# Altium PCB EDR - Water Meter.PcbDoc (part 1 of 2)
Units mm, origin at the board's own origin, x right, y up, seen from the top; angles counter-clockwise.
Board outline 78 x 60 mm, 2 copper layers (Top Layer, Bottom Layer), stack 1.571 mm thick; 60 components, 41 nets, 194 pads, 54 vias.
Unrouted connection lines stored in the file: 1.
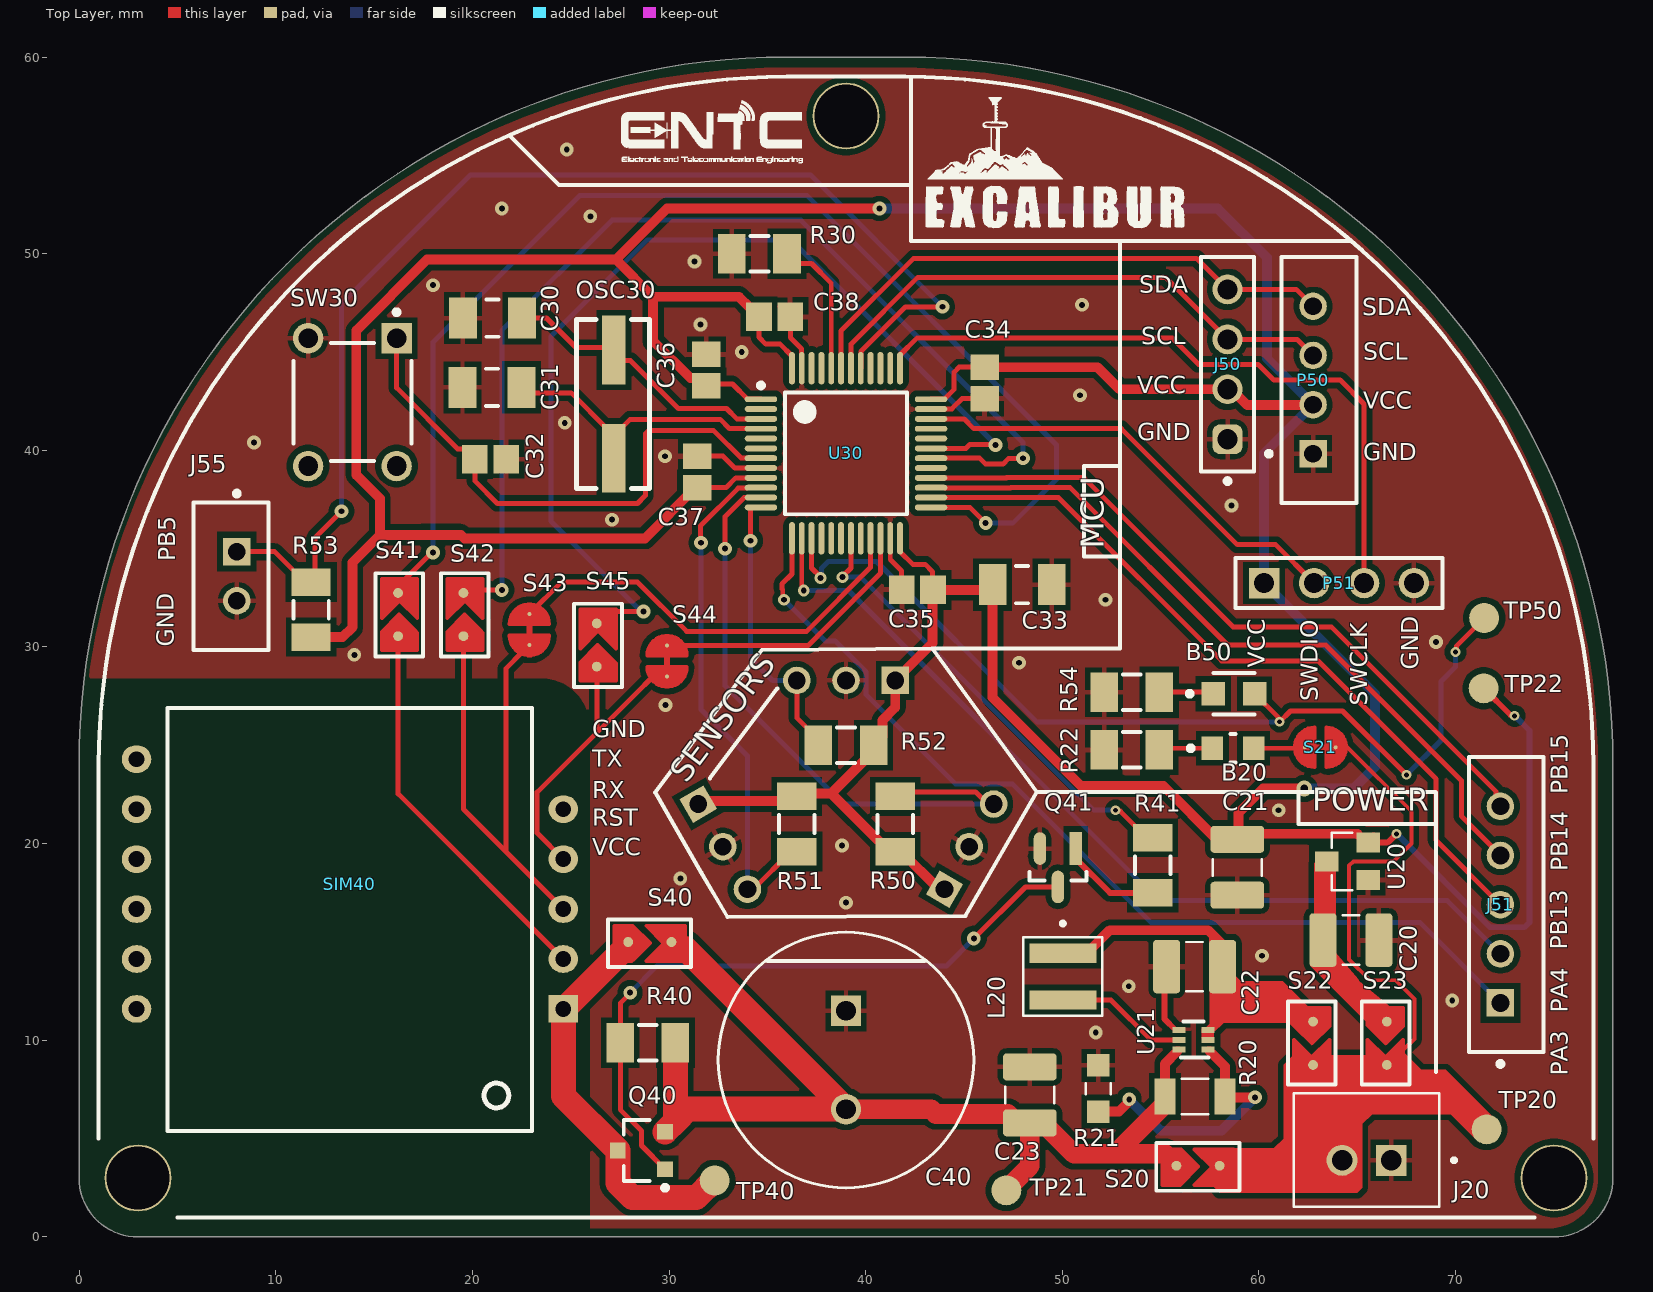
[diagram p0: Top Layer view]
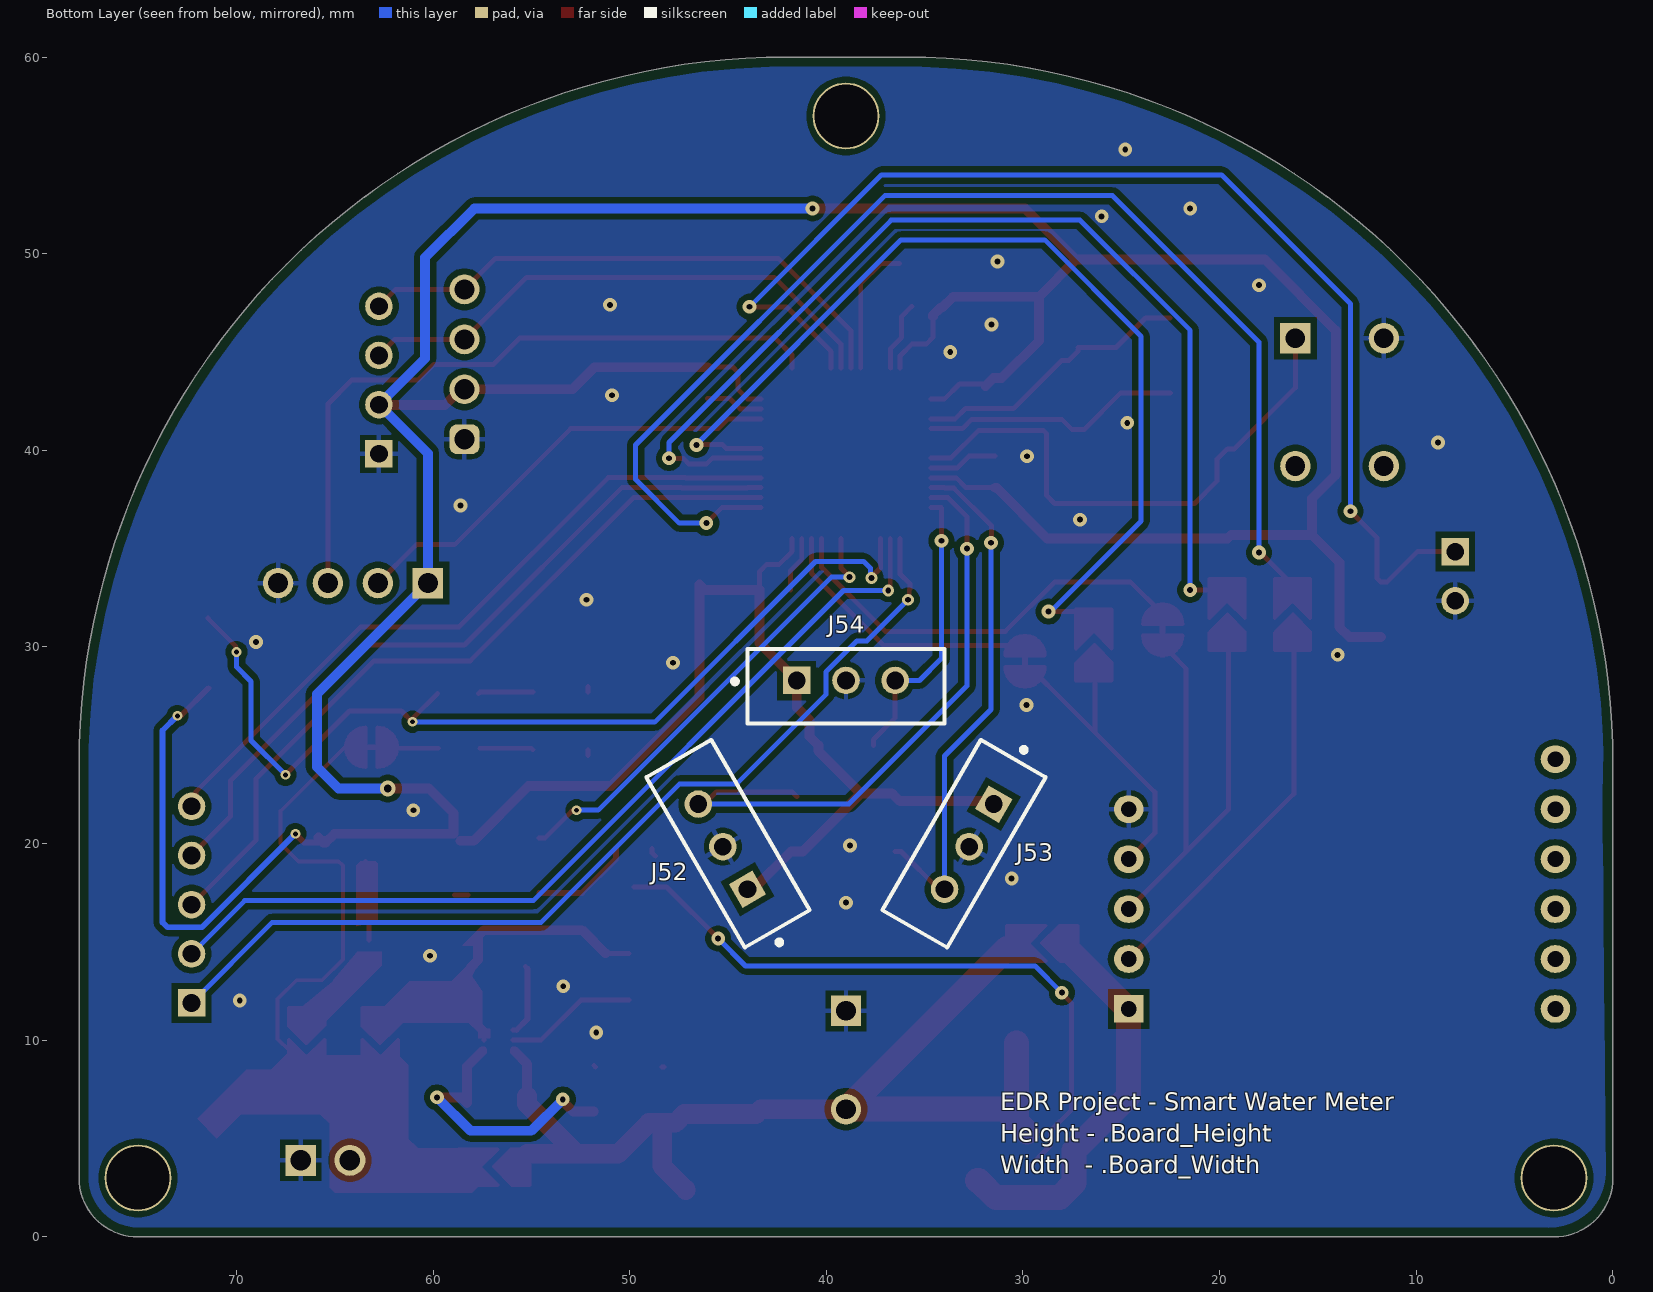
[diagram p1: Bottom Layer view, seen from below]
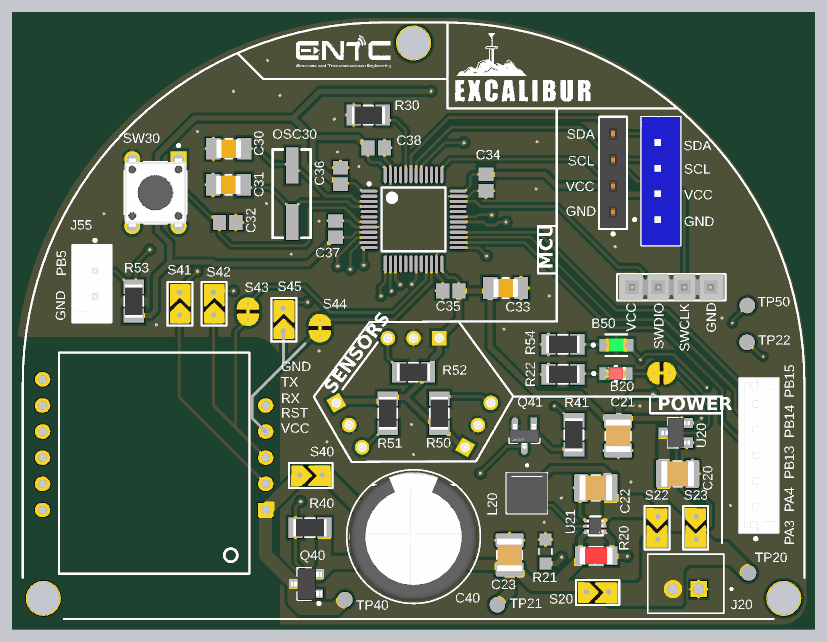
[diagram p2: 3D render of the assembled board from above, using the file's embedded part models]
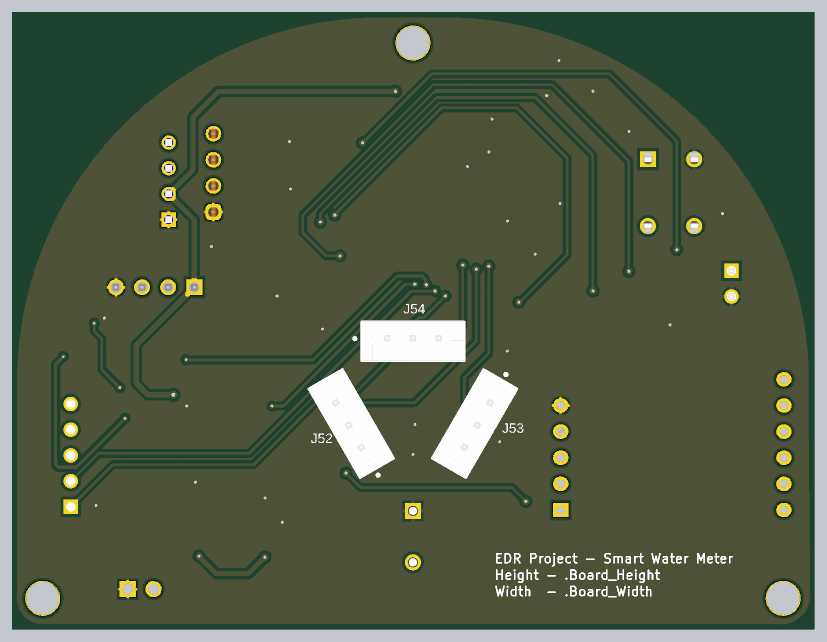
[diagram p3: 3D render of the assembled board from below, using the file's embedded part models]

## Layer stack, top to bottom
Top Solder: solder mask 0.0102, Solder Resist, Dk 3.5
Top Layer: signal copper 0.0356
Dielectric 1: dielectric 1.5, FR-4, Dk 4.6
Bottom Layer: signal copper 0.0356
Bottom Solder: solder mask 0.0102, Solder Resist, Dk 3.5

## Board outline
0,3 ccw(c3,3) 3,0 75,0 ccw(c75,3) 78,3 78,24 ccw(c42,24) 42,60 36,60 ccw(c36,24) 0,24

## Design rules (kind name [scope] priority, off if disabled: settings)
Clearance clearence_polygon [InPolygon] p1: gap=0.3 ignorepadtopadclearanceinfootprint=TRUE
Clearance [All] p2: gap=0.15 ignorepadtopadclearanceinfootprint=TRUE
HoleSize [All] p1: absolutevalues=TRUE maxlimit=5 minlimit=0.025 maxpercent=80.000 minpercent=20.000
MinimumSolderMaskSliver [All] p1: minsoldermaskwidth=0.08
PolygonConnect PolygonConnect_1 [All] p1: thpad.connectstyle=Relief thpad.reliefconductorwidth=0.254 thpad.reliefentries=4 thpad.polygonreliefangle="90 Angle" thpad.airgapwidth=0.254 smdpad.connectstyle=Relief smdpad.reliefconductorwidth=0.254 smdpad.reliefentries=4 smdpad.polygonreliefangle="90 Angle" smdpad.airgapwidth=0.254 via.connectstyle=Direct via.reliefconductorwidth=0.254 via.reliefentries=4 via.polygonreliefangle="90 Angle" via.airgapwidth=0.254
RoutingVias [All] p1: holewidth=0.25 width=0.5 viastyle="Through Hole" minholewidth=0.25 minwidth=0.5 maxholewidth=0.711 maxwidth=1.27
SilkToSilkClearance [All] p1: silktosilkclearance=0.15
SilkToSolderMaskClearance [IsPad] p1: minsilkscreentomaskgap=0.15 clearancetoexposedcopper=TRUE
SolderMaskExpansion [All] p1: expansion=0.102 istentingtop=FALSE
SupplyNets "Schematic Supply Nets_3" [InNet('GND')] p1: voltage=0.000
SupplyNets "Schematic Supply Nets_2" [InNet('+4V')] p2: voltage=0.000
SupplyNets "Schematic Supply Nets_1" [InNet('+3V3')] p3: voltage=0.000
SupplyNets "Schematic Supply Nets" [InNet('VCC')] p4: voltage=0.000
UnRoutedNet [All] p1: checkbadconnections=TRUE
Width [All] p1: maxlimit=2 minlimit=0.1 preferedwidth=0.254 minimp=50.000000 maximp=50.000000 favimp=50.000000
25 further rules are at their usual default settings.

## Classes and differential pairs
net class PB[13..15]: PB13 PB14 PB15
component class Power: .Designator B20 C20 C21 C22 C23 J20 L20 R20 R21 R22 S20 S21 S22 S23 TP20 TP21 TP22 U20 U21
component class Peripherals: .Designator B50 J50 J51 J52 J53 J54 J55 P50 P51 R50 R51 R52 R53 R54 TP50
component class MCU: .Designator C30 C31 C32 C33 C34 C35 C36 C37 C38 OSC30 R30 SW30 U30
component class Communication: .Designator C40 Q40 Q41 R40 R41 S40 S41 S42 S43 S44 S45 SIM40 TP40

## Components (designator, comment, footprint, x,y, rotation, side; value= is the part's Value field where it differs from the comment)
B20 "Red" FP-5988110107F-MFG 58.675,24.85 r0 top
B50 "Green" FP-LTST-C171GKT-MFG 58.725,27.625 r0 top
C20 "22uf" CAPC3225X270N 64.675,15.1 r180 top value=22µF
C21 "22uf" CAPC3225X270N 58.9,18.8 r90 top value=22µF
C22 "22uf" CAPC3225X270N 56.725,13.75 r0 top value=22µF
C23 "22uf" CAPC3225X270N 48.35,7.225 r270 top value=22µF
C30 "22pF" CAP_1206 21.025,46.725 r180 top
C31 "22pF" CAP_1206 21,43.2 r0 top
C32 "100nF" CAPC2013X140X50NL20T25 20.925,39.55 r180 top
C33 "10uF" CAP_1206 47.95,33.175 r180 top
C34 "100nF" CAPC2013X140X50NL20T25 46.05,43.425 r90 top
C35 "100nF" CAPC2013X140X50NL20T25 42.625,32.9 r0 top
C36 "100nF" CAPC2013X140X50NL20T25 31.9,44.075 r270 top
C37 "100nF" CAPC2013X140X50NL20T25 31.425,38.9 r270 top
C38 "100nF" CAPC2013X140X50NL20T25 35.375,46.8 r180 top
C40 "4700uF" FP-RAD-TH-D_12_5_0_5-L_30-MFG 39,9 r270 top
J20 "jst 2" JST_B2B-XH-A 65.475,4.425 r0 top locked
J50 "61300411821" 61300411821 58.4,44.375 r90 top
J51 "B5B-EH-A(LF)(SN)" FP-B5B-EH-A_LF_SN-MFG 72.575,16.9 r90 top
J52 "B3B-EH(LF)(SN)" FP-B3B-EH_LF_SN-MFG 45,20 r60 bottom
J53 "B3B-EH(LF)(SN)" FP-B3B-EH_LF_SN-MFG 33,20 r300 bottom
J54 "B3B-EH(LF)(SN)" FP-B3B-EH_LF_SN-MFG 39,28 r180 bottom
J55 "B2B-EH(LF)(SN)" FP-B2B-EH_LF_SN-MFG 7.725,33.6 r270 top
L20 "2.2uh" IND_XFL4020-222MEC 50.025,13.24 r270 top value=2.2µH
OSC30 "CRYSTAL OSC" Crystal_OSC 27.2,42.35 r90 top
P50 "B4B-EH-A(LF)(SN)" JST-B4B-EH-A_V 62.75,43.575 r90 top
P51 "TSW-104-08-G-S" SMTC-TSW-104-08-X-S 60.26,33.25 r0 top
Q40 "AO3401A" AO-SOT-23-3L_V 28.6,4.4 r180 top
Q41 "MMBT3904-7-F" FP-SOT23-IPC_A 49.775,18.777 r270 top
R20 "68k" RESC3216X70N 56.75,7.15 r180 top value=68kΩ
R21 "12k" RES_ERJPB6B1202V 51.825,7.55 r270 top value=12kΩ
R22 "1k" RES_1206 53.525,24.775 r0 top
R30 "10k" RES_1206 34.6,50 r180 top
R40 "10k" RES_1206 28.925,9.875 r180 top
R41 "1k" RES_1206 54.6,18.9 r270 top
R50 "10k" RES_1206 41.5,21 r270 top
R51 "10k" RES_1206 36.5,21 r90 top
R52 "10k" RES_1206 39,25 r0 top
R53 "10k" RES_1206 11.8,31.9 r270 top
R54 "1k" RES_1206 53.525,27.7 r0 top
S20 "Triangular SB" "Solder Bridge Triangular"#1 56.3,3.55 r0 top
S21 "Soldering Bridge close" "Circular jumper close"#1 63.125,24.9 r180 top net-tie
S22 "Triangular SB" "Solder Bridge Triangular"#2 62.675,10.45 r270 top
S23 "Triangular SB" "Solder Bridge Triangular"#3 66.425,10.45 r270 top
S40 "Triangular SB" "Solder Bridge Triangular"#4 28.425,14.925 r0 top
S41 "Triangular SB" "Solder Bridge Triangular"#5 16.3,31.05 r90 top
S42 "Triangular SB" "Solder Bridge Triangular"#4 19.625,31.05 r90 top
S43 "Soldering Bridge close" "Circular jumper close"#2 22.9,30.875 r90 top net-tie
S44 "Soldering Bridge close" "Circular jumper close"#2 29.9,29.275 r90 top net-tie
S45 "Triangular SB" "Solder Bridge Triangular"#5 26.4,29.5 r90 top
SIM40 "SIM800L" SIM800L 24.625,11.595 r180 top
SW30 "MJTP1230A" FP-MJTP1230A-MFG 13.9,42.45 r270 top
TP20 "Test Pad" "Test Pad" 71.575,5.475 r90 top
TP21 "Test Pad" "Test Pad" 47.15,2.375 r90 top
TP22 "Test Pad" "Test Pad" 71.425,27.9 r90 top
TP40 "Test Pad" "Test Pad" 32.325,2.875 r90 top
TP50 "Test Pad" "Test Pad" 71.45,31.475 r90 top locked
U20 "PMIC-LDO-XC6206P332MR-G(SOT23)" SOT-23 64.5,19.1 r90 top
U21 "TPS61023DRLR" DRL0006A 56.675,10.025 r180 top
U30 "STM32L071CBT6" STM-LQFP48_M 39,39.85 r0 top

## Footprints (in the part's own frame and the unit in brackets; to place one, negate y for a bottom-side part, rotate by r counter-clockwise, add the part's x,y. Pads: shape width x height; smd on the part's side, far side on the other; paste and mask are expansions set on the pad)
61300411821 [mm] "Socket Header, Pitch 2.54 mm, THT, Vertical, single row, 4p"
  rrect50% 1.52x1.52 hole 1.02: 1(-3.81,0)
  round 1.52 hole 1.02: 2(-1.27,0) 3(1.27,0) 4(3.81,0)
  silkscreen extent -6.06,-1.35 5.46,1.35, body extent -5.33,-1.25 5.33,1.25, height 8.55
AO-SOT-23-3L_V [mm] "SOT23, 3-Leads, Body 3.1x1.8mm, Pitch 0.95mm"
  rect 0.8x0.8 smd: 1(-1.2,0.95) 2(-1.2,-0.95) 3(1.2,0)
  silkscreen extent -1.33,-1.55 0.9,2.02, body extent -1.5,-1.55 1.5,1.55, height 1.25
CAP_1206 [mm] "SMD capacitor 3.2mm × 1.6mm size (1206)"
  rect 1.4x2.1 smd: 1(-1.5,0) 2(1.5,0)
  silkscreen extent -0.3,-0.95 0.3,0.95, body extent -1.2,-0.9 1.2,0.9, height 1.2
CAPC2013X140X50NL20T25 [mm] "Chip Capacitor, 2-Leads, Body 2.00x1.25mm, IPC Medium Density"
  rect 1.3x1.45 smd: 1(-0.8,0) 2(0.8,0)
  body extent -1.1,-0.72 1.1,0.72, height 1.4
CAPC3225X270N [mm]
  rrect25% 1.37x2.72 smd: 1(-1.421,0) 2(1.421,0)
  silkscreen extent -0.42,-1.25 0.42,1.25, body extent -1.6,-1.25 1.6,1.25, height 2.7
"Circular jumper close"#1 [mm]
  round 0.2 smd mask+0: 1(-0.775,0) 2(0.8,0)
  Top Layer region: 0.3,1 0.5,1 0.6,0.9 0.7,0.9 0.9,0.7 1,0.7 1,0.6 1.3,0.3 1.3,-0.1 1.2,-0.2 1.2,-0.4 1,-0.6 1,-0.7 0.9,-0.8 0.8,-0.8 0.6,-1 0.3,-1 0.3,0
  Top Layer region: -0.3,-1 -0.5,-1 -0.6,-0.9 -0.7,-0.9 -0.9,-0.7 -1,-0.7 -1,-0.6 -1.3,-0.3 -1.3,0.1 -1.2,0.2 -1.2,0.4 -1,0.6 -1,0.7 -0.9,0.8 -0.8,0.8 -0.6,1 -0.3,1 -0.3,0
  Top Layer lines w0.2: 0.3,1 cw(c0.3,0) 0.3,-1 0.3,0 0.3,1 ; -0.3,1 ccw(c-0.3,0) -0.3,-1 -0.3,0 -0.3,1
  Top Layer lines w0.3: 0.3,0 -0.3,0
"Circular jumper close"#2 [mm]
  round 0.2 smd mask+0: 1(-0.775,0) 2(0.8,0)
  Top Layer region: -0.3,-1 -0.5,-1 -0.6,-0.9 -0.7,-0.9 -0.9,-0.7 -1,-0.7 -1,-0.6 -1.3,-0.3 -1.3,0.1 -1.2,0.2 -1.2,0.4 -1,0.6 -1,0.7 -0.9,0.8 -0.8,0.8 -0.6,1 -0.3,1 -0.3,0
  Top Layer region: 0.3,1 0.5,1 0.6,0.9 0.7,0.9 0.9,0.7 1,0.7 1,0.6 1.3,0.3 1.3,-0.1 1.2,-0.2 1.2,-0.4 1,-0.6 1,-0.7 0.9,-0.8 0.8,-0.8 0.6,-1 0.3,-1 0.3,0
  Top Layer lines w0.2: -0.3,1 ccw(c-0.3,0) -0.3,-1 -0.3,1 ; 0.3,1 cw(c0.3,0) 0.3,-1 0.3,1
  Top Layer lines w0.3: -0.3,0 0.3,0
Crystal_OSC [mm]
  rect 3.5x1.2 smd: 1(-2.75,0) 2(2.75,0)
  silkscreen extent -4.3,-1.8 4.3,1.9
DRL0006A [mm]
  rect 0.67x0.3 smd: 1(-0.74,0.5) 2(-0.74,0) 3(-0.74,-0.5) 4(0.74,-0.5) 5(0.74,0) 6(0.74,0.5)
  silkscreen extent -0.76,-0.94 0.63,0.89, body extent -0.8,-0.8 0.8,0.8, height 0.6
FP-5988110107F-MFG [mm]
  rect 1.1x1.2 smd paste+0 mask+0: 1(-1.05,0) 2(1.05,0)
  silkscreen extent -2.27,-0.72 0.13,0.72, body extent -1.7,-0.82 1.7,0.82, height 0.25
FP-B2B-EH_LF_SN-MFG [mm]
  rect 1.4x1.4 hole 0.9 paste-2539.97 mask+0: 1(-1.25,0.3)
  round 1.4 hole 0.9 paste-2539.97 mask+0: 2(1.25,0.3)
  silkscreen extent -4.32,-1.9 3.75,1.9, body extent -3.85,-2 3.85,2, height 0.25
FP-B3B-EH_LF_SN-MFG [mm]
  rect 1.4x1.4 hole 0.9 paste-2539.97 mask+0: 1(-2.5,0.3)
  round 1.4 hole 0.9 paste-2539.97 mask+0: 2(0,0.3) 3(2.5,0.3)
  silkscreen extent -5.77,-1.9 5,1.9, body extent -5,-1.9 5,1.9, height 6
FP-B5B-EH-A_LF_SN-MFG [mm]
  rect 1.4x1.4 hole 0.9 paste-2539.97 mask+0: 1(-5,0.3)
  round 1.4 hole 0.9 paste-2539.97 mask+0: 2(-2.5,0.3) 3(0,0.3) 4(2.5,0.3) 5(5,0.3)
  silkscreen extent -8.22,-1.9 7.5,1.9, body extent -7.6,-2 7.6,2, height 0.25
FP-LTST-C171GKT-MFG [mm]
  rect 1.2x1.2 smd paste+0 mask+0: 1(-1.05,0) 2(1.05,0)
  silkscreen extent -2.37,-1.05 1.05,1.05, body extent -1.75,-0.77 1.75,0.77, height 0.25
FP-MJTP1230A-MFG [mm]
  rect 1.55x1.55 hole 1 paste-2539.97 mask+0: 1(-3.25,2.25)
  round 1.55 hole 1 paste-2539.97 mask+0: 2(3.25,2.25) 3(-3.25,-2.25) 4(3.25,-2.25)
  silkscreen extent -4.7,-3 3,3, body extent -4.13,-3.13 4.13,3.13, height 0.25
FP-RAD-TH-D_12_5_0_5-L_30-MFG [mm]
  rect 1.55x1.55 hole 1 paste-2539.97 mask+0: 1(-2.5,0)
  round 1.55 hole 1 paste-2539.97 mask+0: 2(2.5,0)
  silkscreen extent -6.5,-6.5 6.5,6.5, body extent -6.6,-6.6 6.6,6.6, height 0.25
FP-SOT23-IPC_A [mm]
  rect 1.659x0.627 smd paste+0 mask+0: 1(-0.977,0.915)
  rrect100% 1.659x0.627 smd paste+0 mask+0: 2(-0.977,-0.915) 3(0.977,0)
  silkscreen extent 0.23,-1.45 0.65,1.45, body extent -2.31,-1.95 2.31,1.95, height 0.25
IND_XFL4020-222MEC [mm]
  rect 0.98x3.4 smd: 1(-1.185,0) 2(1.185,0)
  silkscreen extent -2.8,-2 2,2, body extent -2,-2 2,2, height 2.1
JST-B4B-EH-A_V [mm] "Header, 4-Leads, Body 12.5x3.8mm, Pitch 2.5mm"
  rect 1.4x1.4 hole 0.9: 1(-3.75,0)
  round 1.4 hole 0.9: 2(-1.25,0) 3(1.25,0) 4(3.75,0)
  silkscreen extent -6.25,-2.2 6.25,2.37, body extent -6.25,-2.2 6.25,1.6, height 6
JST_B2B-XH-A [mm]
  rect 1.575x1.575 / inner round 1.575 / far side rect 1.575x1.575 hole 1.05: 1(1.25,-0.525)
  round 1.575 hole 1.05: 2(-1.25,-0.525)
  silkscreen extent -3.7,-2.88 4.54,2.88
RES_1206 [mm] "SMD 3.2mm × 1.6mm resistor (1206)"
  rect 1.4x2 smd: 1(-1.4,0) 2(1.4,0)
  silkscreen extent -0.45,-0.9 0.45,0.9, body extent -1.6,-0.85 1.6,0.85, height 0.65
RES_ERJPB6B1202V [mm]
  rect 1.15x1.15 smd: 1(-1.175,0) 2(1.175,0)
  silkscreen extent -0.28,-0.63 0.28,0.63
RESC3216X70N [mm]
  rect 1.06x1.82 smd paste+0 mask+0.102: 1(-1.528,0) 2(1.528,0)
  silkscreen extent -0.68,-0.9 0.68,0.9, body extent -1.6,-0.8 1.6,0.8, height 0.7
SIM800L [mm]
  rect 1.5x1.4 hole 0.8: 1(0,0)
  oval 1.5x1.4 hole 0.8: 2(0,-2.54) 3(0,-5.08) 4(0,-7.62) 5(0,-10.16) 6(21.7,-12.7) 7(21.7,-10.16) 8(21.7,-7.62) 9(21.7,-5.08) 10(21.7,-2.54) 11(21.7,0)
  silkscreen extent 1.58,-15.3 20.12,6.2
SMTC-TSW-104-08-X-S [mm] ".025 SQ Post Terminal Strip Assembly, 1x4 Pins, Vertical, 2.54mm Pitch, Male"
  rect 1.55x1.55 hole 1.02: 1(0,0)
  round 1.55 hole 1.02: 2(2.54,0) 3(5.08,0) 4(7.62,0)
  silkscreen extent -1.46,-1.27 9.08,1.27, body extent -1.27,-1.27 8.89,1.27, height 8.38
"Solder Bridge Triangular"#1 [mm]
  round 0.5 smd mask+0: 1(1.7,0.075) 2(-0.5,0.075)
  Top Layer region: 0.425,0.9 2.325,0.9 2.325,-0.9 0.425,-0.9 1.325,0
  Top Layer region: -1.2,0.9 -0.2,0.9 0.7,0 -0.2,-0.9 -1.2,-0.9
  Top Layer lines w0.2: 0.675,0.9 2.225,0.9 ; 0.675,0.9 0.425,0.9 1.325,0 0.425,-0.9 2.4,-0.9 2.4,0.075 2.4,0.9 2.225,0.9 ; 0.675,0.9 2.225,0.9 ; -1.2,-0.9 -0.325,-0.9 0.6,0.025 -0.275,0.9 -1.2,0.9 -1.2,-0.9
  silkscreen extent -1.53,-1.2 2.7,1.22
"Solder Bridge Triangular"#2 [mm]
  round 0.5 smd mask+0: 1(1.7,0.075) 2(-0.5,0.075)
  Top Layer region: 0.425,0.9 2.325,0.9 2.325,-0.9 0.425,-0.9 1.325,0
  Top Layer region: -1.2,0.9 -0.2,0.9 0.7,0 -0.2,-0.9 -1.2,-0.9
  Top Layer lines w0.2: 2.225,0.9 0.675,0.9 ; 2.225,0.9 0.675,0.9 ; 2.225,0.9 2.4,0.9 2.4,-0.9 0.425,-0.9 1.325,0 0.425,0.9 0.675,0.9 ; -0.325,-0.9 0.6,0.025 -0.275,0.9 -1.2,0.9 -1.2,-0.625 -1.2,-0.9 -0.325,-0.9
  silkscreen extent -1.53,-1.2 2.7,1.22
"Solder Bridge Triangular"#3 [mm]
  round 0.5 smd mask+0: 1(1.7,0.075) 2(-0.5,0.075)
  Top Layer region: 0.425,0.9 2.325,0.9 2.325,-0.9 0.425,-0.9 1.325,0
  Top Layer region: -1.2,0.9 -0.2,0.9 0.7,0 -0.2,-0.9 -1.2,-0.9
  Top Layer lines w0.2: 2.225,0.9 0.95,0.9 ; 2.225,0.9 0.95,0.9 ; 2.225,0.9 2.4,0.9 2.4,-0.9 0.425,-0.9 1.325,0 0.425,0.9 0.675,0.9 ; 0.95,0.9 0.675,0.9 ; 0.95,0.9 0.675,0.9 ; -0.325,-0.9 0.6,0.025 -0.275,0.9 -1.2,0.9 -1.2,-0.9 -0.325,-0.9
  silkscreen extent -1.53,-1.2 2.7,1.22
"Solder Bridge Triangular"#4 [mm]
  round 0.5 smd mask+0: 1(1.7,0.075) 2(-0.5,0.075)
  Top Layer region: -1.2,0.9 -0.2,0.9 0.7,0 -0.2,-0.9 -1.2,-0.9
  Top Layer region: 0.425,0.9 2.325,0.9 2.325,-0.9 0.425,-0.9 1.325,0
  Top Layer lines w0.2: 0.675,0.9 2.4,0.9 2.4,-0.9 0.425,-0.9 1.325,0 0.425,0.9 2.225,0.9 ; -1.2,-0.9 -1.2,0.9 -0.275,0.9 0.6,0.025 -0.325,-0.9 -1.2,-0.9
  silkscreen extent -1.53,-1.2 2.7,1.22
"Solder Bridge Triangular"#5 [mm]
  round 0.5 smd mask+0: 1(1.7,0.075) 2(-0.5,0.075)
  Top Layer region: -1.2,0.9 -0.2,0.9 0.7,0 -0.2,-0.9 -1.2,-0.9
  Top Layer region: 0.425,0.9 2.325,0.9 2.325,-0.9 0.425,-0.9 1.325,0
  Top Layer lines w0.2: 0.675,0.9 2.225,0.9 ; 0.675,0.9 2.225,0.9 ; 0.675,0.9 0.425,0.9 1.325,0 0.425,-0.9 2.4,-0.9 2.4,0.9 2.225,0.9 ; -1.2,0.9 -1.2,-0.9 -0.325,-0.9 0.6,0.025 -0.275,0.9 -1.2,0.9
  silkscreen extent -1.53,-1.2 2.7,1.22
SOT-23 [mm]
  rect 1.016x1.2 smd: 1(-0.95,-1.06) 2(0.95,-1.06) 3(0,1.06)
  silkscreen extent -1.46,-0.25 1.46,0.8, body extent -1.45,-1.4 1.45,1.4, height 1.3
STM-LQFP48_M [mm] "QFP, 48-Leads, Body 7x7mm, Pitch 0.5mm, IPC Low Density"
  oval 1.65x0.3 smd: 1(-4.325,2.75) 2(-4.325,2.25) 3(-4.325,1.75) 4(-4.325,1.25) 5(-4.325,0.75) 6(-4.325,0.25) 7(-4.325,-0.25) 8(-4.325,-0.75) 9(-4.325,-1.25) 10(-4.325,-1.75) 11(-4.325,-2.25) 12(-4.325,-2.75) 25(4.325,-2.75) 26(4.325,-2.25) 27(4.325,-1.75) 28(4.325,-1.25) 29(4.325,-0.75) 30(4.325,-0.25) 31(4.325,0.25) 32(4.325,0.75) 33(4.325,1.25) 34(4.325,1.75) 35(4.325,2.25) 36(4.325,2.75)
  oval 0.3x1.65 smd: 13(-2.75,-4.325) 14(-2.25,-4.325) 15(-1.75,-4.325) 16(-1.25,-4.325) 17(-0.75,-4.325) 18(-0.25,-4.325) 19(0.25,-4.325) 20(0.75,-4.325) 21(1.25,-4.325) 22(1.75,-4.325) 23(2.25,-4.325) 24(2.75,-4.325) 37(2.75,4.325) 38(2.25,4.325) 39(1.75,4.325) 40(1.25,4.325) 41(0.75,4.325) 42(0.25,4.325) 43(-0.25,4.325) 44(-0.75,4.325) 45(-1.25,4.325) 46(-1.75,4.325) 47(-2.25,4.325) 48(-2.75,4.325)
  silkscreen extent -4.45,-3.1 3.1,3.57, body extent -3.5,-3.5 3.5,3.5, height 1.6
"Test Pad" [mil]
  round 60 smd: 1(0,0)

## Part data
B20: library part CMP-00106-00868569-1, "598-8110-107F 598-8110-107F, Dialight, SMD LED 0805 Package, Red Single color SOLD IN INCREMENTS OF 4000. (REEL)", Case Code (Imperial)=0805, Case Code (Metric)=2012, Forward Current=20mA, Forward Voltage=2.2V, Max Junction Temperature (Tj)=105°C, Max Operating Temperature=85°C, Min Operating Temperature=-30°C, Power Dissipation=60mW, Reverse Voltage=5V, Case/Package=0805, Color=Red, Depth=1.25mm, Dominant Wavelength=635nm, Height=800µm, Illumination Color=Red, Lead Free="Lead Free", Length=2mm, Lens Style=Clear, Luminous Intensity=40mcd, Mount="Surface Mount", NexarPartId=868569, Number of Elements=1, Number of LEDs=1, Number of Pins=2, Radiation Hardening=No, REACH SVHC="No SVHC", RoHS=Compliant, Schedule B="8541402000, 8541402000", Test Current=20mA, Viewing Angle=140°, Wavelength=635nm, Width=1.25mm
B50: library part CMP-22017-000007-1, "LED GREEN CLEAR CHIP SMD", Case Code (Imperial)=0805, Case Code (Metric)=2012, Forward Current=30mA, Forward Voltage=2.1V, Lens Color=Colorless, Max Operating Temperature=85°C, Min Operating Temperature=-55°C, Package Quantity=1, Power Dissipation=100mW, Reverse Voltage=5V, Test Current=10mA, Case/Package=0805, Color=Green, Depth=1.25mm, Dominant Wavelength=569nm, Height=0.8mm, Illumination Color=Green, Lead Free="Lead Free", Length=2mm, Lens Style=Diffused, Lens Transparency=Clear, Luminous Intensity=12mcd, Mount="Surface Mount", Number of Elements=1, Number of LEDs=1, Number of Pins=2, Packaging="Tape and Reel", Power Rating=100mW, Radiation Hardening=No, Viewing Angle=130°, Wavelength=585nm, Width=1.25mm
C20 C21 C22 C23: library part CAPC3225X270N, "25V 22uF X7R 卤10% 1210 Multilayer Ceramic Capacitors MLCC - SMD/SMT ROHS", Case Code (Imperial)=1210, Case Code (Metric)=3225, Dielectric=X7R, Dielectric Material=Ceramic, Manufacturer="Samsung Electro-Mechanics", Manufacturer Part Number=CL32B226KAJNNNE, Max Operating Temperature=125°C, Min Operating Temperature=-55°C, Tolerance=10%, Voltage Rating=25V, Case/Package=1210, Category="Ceramic Capacitors", China RoHS=Compliant, ComponentLink1Description=https://datasheet.octopart.com:443/CL32B226KAJNNNE-Samsung-Electro-Mechanics-datasheet-136482669.pdf?src-supplier=Newark, ComponentLink1URL=https://datasheet.octopart.com:443/CL32B226KAJNNNE-Samsung-Electro-Mechanics-datasheet-136482669.pdf?src-supplier=Newark, ComponentLink2Description=https://datasheet.octopart.com:443/CL32B226KAJNNNE-Samsung-Electro-Mechanics-datasheet-149049204.pdf?src-supplier=Future+Electronics, ComponentLink2URL=https://datasheet.octopart.com:443/CL32B226KAJNNNE-Samsung-Electro-Mechanics-datasheet-149049204.pdf?src-supplier=Future+Electronics, ComponentLink3Description=https://datasheet.octopart.com:443/CL32B226KAJNNNE-Samsung-Electro-Mechanics-datasheet-116051342.pdf?src-supplier=Future+Electronics, ComponentLink3URL=https://datasheet.octopart.com:443/CL32B226KAJNNNE-Samsung-Electro-Mechanics-datasheet-116051342.pdf?src-supplier=Future+Electronics, ComponentLink4Description=https://datasheet.octopart.com:443/CL32B226KAJNNNE-Samsung-Electro-Mechanics-datasheet-81462649.pdf?src-supplier=Future+Electronics, ComponentLink4URL=https://datasheet.octopart.com:443/CL32B226KAJNNNE-Samsung-Electro-Mechanics-datasheet-81462649.pdf?src-supplier=Future+Electronics, ComponentLink5Description=https://datasheet.octopart.com:443/CL32B226KAJNNNE-Samsung-datasheet-42485260.pdf?src-supplier=Future+Electronics, ComponentLink5URL=https://datasheet.octopart.com:443/CL32B226KAJNNNE-Samsung-datasheet-42485260.pdf?src-supplier=Future+Electronics, ComponentLink6Description=https://datasheet.octopart.com:443/CL32B226KAJNNNE-Samsung-datasheet-28848742.pdf?src-supplier=Future+Electronics, ComponentLink6URL=https://datasheet.octopart.com:443/CL32B226KAJNNNE-Samsung-datasheet-28848742.pdf?src-supplier=Future+Electronics, ComponentLink7Description=https://datasheet.octopart.com:443/CL32B226KAJNNNE-Samsung-datasheet-37081328.pdf?src-supplier=Future+Electronics, ComponentLink7URL=https://datasheet.octopart.com:443/CL32B226KAJNNNE-Samsung-datasheet-37081328.pdf?src-supplier=Future+Electronics, ComponentLink8Description=https://datasheet.octopart.com/CL32B226KAJNNNE-Samsung-Electro-Mechanics-datasheet-97040617.pdf, ComponentLink8URL=https://datasheet.octopart.com/CL32B226KAJNNNE-Samsung-Electro-Mechanics-datasheet-97040617.pdf, ComponentLink9Description=https://datasheet.octopart.com/CL32B226KAJNNNE-Samsung-Electro-Mechanics-datasheet-8324245.pdf, ComponentLink9URL=https://datasheet.octopart.com/CL32B226KAJNNNE-Samsung-Electro-Mechanics-datasheet-8324245.pdf, ComponentLink10Description=https://datasheet.octopart.com:443/CL32B226KAJNNNE-Samsung-datasheet-59220082.pdf?src-supplier=TME, ComponentLink10URL=https://datasheet.octopart.com:443/CL32B226KAJNNNE-Samsung-datasheet-59220082.pdf?src-supplier=TME, Country of Origin="Mainland China, Philippines, South Korea", Depth=2.5mm, Export Control Classification Number (ECCN) Code=EAR99, Harmonized Tariff Schedule (HTS) Code=8532.24.00.20, Height=2.7mm, Introduction Date=2010-04-14, Lead Free="Lead Free", Length=3.2mm, Lifecycle Status=Production, Material=Ceramic, Mounting Technology="Surface Mount", Number of Terminals=2, Pricing="1000=0.106, 3000=0.103, 5000=0.102, 15000=0.0993, 25000=0.0969 (USD)", Radiation Hardening=No, REACH SVHC=Yes, RoHS=Compliant, Schedule B="8532240020, 8532240020|8532240020|8532240020|8532240020|8532240020|8532240020|8532240020|8532240020|8532240020|8532240020|8532240020|8532240020|8532240020|8532240020|8532240020|8532240020|8532240020|8532240020|8532240020|8532240020|8532240020|8532240020|8532240020|85", Stock=1822000, Supplier="Future Electronics", Supplier Part Number=CL32B226KAJNNNE, Thickness=2.6924mm, Voltage Rating (DC)=25V, Width=2.5mm
C30 C31 C33: library part CAP_1206, "SMD 3.2mm × 1.6mm size capacitor (1206)"
C32 C34 C35 C36 C37 C38: library part CMP-2007-04663-1, Manufacturer="AVX Interconnect / Elco", Part Number=0805YD105MAT2A
C40: library part CMP-05427-000691-1, "Aluminum Electrolytic Capacitors (Radial Lead Type) AEC-Q200 Qualified 4700uF ±20% 10V"
J20: library part "2pin jst", "CONNECTOR HEADER, XH SERIES, 2 POSITION, 2.50MM, Press-Fit Solder, Detent Lock, Natural", Color="Natural, White", Contact Resistance=20mΩ, Current Rating=3A, Housing Color=White, Insulation Resistance=1GΩ, Manufacturer=JST, Manufacturer Part Number=B2B-XH-A(LF)(SN), Max Operating Temperature=85°C, Max Voltage Rating (AC)=250V, Min Operating Temperature=-25°C, Ratings=TUV, Category="Headers and Wire Housings", China RoHS=Compliant, ComponentLink1Description=https://datasheet.octopart.com:443/B2B-XH-A%28LF%29%28SN%29-JST-datasheet-12510042.pdf?src-supplier=Newark, ComponentLink1URL=https://datasheet.octopart.com:443/B2B-XH-A%28LF%29%28SN%29-JST-datasheet-12510042.pdf?src-supplier=Newark, ComponentLink2Description=https://datasheet.octopart.com:443/B2B-XH-A-%28LF%29%28SN%29-JST-datasheet-41261050.pdf?src-supplier=Newark, ComponentLink2URL=https://datasheet.octopart.com:443/B2B-XH-A-%28LF%29%28SN%29-JST-datasheet-41261050.pdf?src-supplier=Newark, ComponentLink3Description=https://datasheet.octopart.com:443/B2B-XH-A%28LF%29%28SN%29-JST-datasheet-63094.pdf?src-supplier=Upverter, ComponentLink3URL=https://datasheet.octopart.com:443/B2B-XH-A%28LF%29%28SN%29-JST-datasheet-63094.pdf?src-supplier=Upverter, ComponentLink4Description=https://datasheet.octopart.com:443/B2B-XH-A%28LF%29%28SN%29-JST-datasheet-8325564.pdf?src-supplier=Burklin+Elektronik, ComponentLink4URL=https://datasheet.octopart.com:443/B2B-XH-A%28LF%29%28SN%29-JST-datasheet-8325564.pdf?src-supplier=Burklin+Elektronik, ComponentLink5Description=https://datasheet.octopart.com:443/B2B-XH-A%28LF%29%28SN%29-JST-datasheet-138896056.pdf?src-supplier=IHS, ComponentLink5URL=https://datasheet.octopart.com:443/B2B-XH-A%28LF%29%28SN%29-JST-datasheet-138896056.pdf?src-supplier=IHS, ComponentLink6Description=https://datasheet.octopart.com:443/B2B-XH-A-%28LF%29%28SN%29-JST-datasheet-62336360.pdf?src-supplier=element14+APAC, ComponentLink6URL=https://datasheet.octopart.com:443/B2B-XH-A-%28LF%29%28SN%29-JST-datasheet-62336360.pdf?src-supplier=element14+APAC, ComponentLink7Description=https://datasheet.octopart.com:443/B2B-XH-A%28LF%29%28SN%29-JST-datasheet-10026044.pdf?src-supplier=TME, ComponentLink7URL=https://datasheet.octopart.com:443/B2B-XH-A%28LF%29%28SN%29-JST-datasheet-10026044.pdf?src-supplier=TME, ComponentLink8Description=https://datasheet.octopart.com:443/B2B-XH-A%28LF%29%28SN%29-JST-datasheet-140264791.pdf?src-supplier=LKR, ComponentLink8URL=https://datasheet.octopart.com:443/B2B-XH-A%28LF%29%28SN%29-JST-datasheet-140264791.pdf?src-supplier=LKR, ComponentLink9Description=https://datasheet.octopart.com:443/B2B-XH-A%28LF%29%28SN%29-JST-datasheet-157850277.pdf?src-supplier=Amar+Radio+Corporation, ComponentLink9URL=https://datasheet.octopart.com:443/B2B-XH-A%28LF%29%28SN%29-JST-datasheet-157850277.pdf?src-supplier=Amar+Radio+Corporation, Connector Type="Male Pin", Contact Material="Copper, Tin", Contact Plating=Tin, Depth=5.75mm, Fastening Type=Detent, Gender=Male, Height=7mm, Housing Material=Polyamide, Lead Free="Lead Free", Lead Pitch=2.5mm, Length=7.4mm, Lifecycle Status=Production, Max Current Rating=3A, Max Voltage Rating (DC)=250V, Mounting Technology="Through Hole", Number of Contacts=2, Number of Positions=2, Number of Rows=1, Orientation=Straight, Pins=2, Pitch=2.5mm, Pricing="1=0.0946, 10=0.0729, 25=0.0722, 100=0.0518, 500=0.05, 1000=0.0407 (USD)", REACH SVHC=Yes, RoHS=Compliant, Stock=85075, Supplier="Arrow Electronics", Supplier Part Number=B2B-XH-A(LF)(SN), Terminal Pitch=2.5mm, Termination=Solder, Voltage Rating=250V, Voltage Rating (AC)=250V, Weight=28.349523g, Width=6.35mm, Wire/Cable Gauge=22AWG
J50: library part CMP-1502-01316-4, "THT Vertical Socket Header WR-PHD, Pitch 2.54 mm, Single Row, 4 pins", Contact Resistance=20mΩ, Current Rating=3A, Operating Supply Voltage=250V, Gender=Female, Lead Pitch=2.54mm, Number of Pins=4, Orientation=Vertical
J51: library part CMP-17439-000382-1, "CONN HEADER VERT 5POS 2.5MM", Color=Natural, Current Rating=3A, Flammability Rating="UL94 V-0", Housing Color=White, Voltage Rating=250V, Connector Type=Header, Contact Finish - Mating=TIN, Contact Material=Brass, Contact Mating Length=0.13inch, Contact Plating=Tin, Contact Shape=Square, Contact Type="Male Pin", Fastening Type=Friction, Gender=Male, Insulation Color=Natural, Insulation Material=Nylon, Lead Free="Lead Free", Mated Stacking Heights=8.1mm, Mount="Through Hole", Number of Contacts=5, Number of Positions=5, Number of Rows=1, Orientation=Straight, Packaging=Bulk, Pitch=2.5mm, Series=EH, Termination=Solder
J52 J53 J54: library part CMP-17439-000692-1, "3 Position Single Row 2.5 mm Press Fit Through Hole Shrouded Pin Header", Current Rating=3A, Voltage Rating=250V, Contact Material=Brass, Lead Free="Lead Free", Mount="Through Hole", Number of Contacts=3, Number of Positions=3, Number of Rows=1, Orientation=Straight, Pitch=2.5mm, Series=EH, Termination=Solder
J55: library part CMP-17439-000683-1, "Connector Header, EH Series, 2 Position, 2.5mm, Through Hole, Press-Fit, Solder, Natural", Current Rating=3A, Voltage Rating=250V, Contact Material=Brass, Lead Free="Lead Free", Mount="Through Hole", Number of Contacts=2, Number of Positions=2, Number of Rows=1, Orientation=Straight, Pitch=2.5mm, Series=EH, Termination=Solder
L20: library part XFL4020-222MEC, "Inductor Power Shielded Wirewound 2.2uH 20% 1MHz 8A 0.0235Ohm DCR 1515 Automotive T/R", Ambient Temperature Range High=125°C, Case/Package=1616, DC Resistance (DCR)=23.5mΩ, Inductance Tolerance=20%, Manufacturer=Coilcraft, Max Current Rating=8A, Min Operating Temperature=-40°C, Ratings=AEC-Q200, Saturation Current=3.1A, Self Resonant Frequency=38MHz, Test Frequency=1MHz, Category="Fixed Inductors", China RoHS=Compliant, ComponentLink1Description=https://datasheet.octopart.com:443/XFL4020-222MEC-Coilcraft-datasheet-180122279.pdf?src-supplier=IHS, ComponentLink1URL=https://datasheet.octopart.com:443/XFL4020-222MEC-Coilcraft-datasheet-180122279.pdf?src-supplier=IHS, ComponentLink2Description=https://datasheet.octopart.com:443/XFL4020-222MEC-Coilcraft-datasheet-10792328.pdf?src-supplier=Coilcraft+Direct, ComponentLink2URL=https://datasheet.octopart.com:443/XFL4020-222MEC-Coilcraft-datasheet-10792328.pdf?src-supplier=Coilcraft+Direct, ComponentLink3Description=https://datasheet.octopart.com:443/XFL4020-222MEC-Coilcraft-datasheet-14354401.pdf?src-supplier=Newark, ComponentLink3URL=https://datasheet.octopart.com:443/XFL4020-222MEC-Coilcraft-datasheet-14354401.pdf?src-supplier=Newark, Core Material=Composite, ESR=23.5mΩ, Height=2.1mm, Lead Free="Contains Lead", Length=4mm, Lifecycle Status=Production, Manufacturer Part Number=XFL4020-222MEC, Max DC Current=8A, Max Operating Temperature=125°C, Mounting Technology="Surface Mount", Number of Circuits=1, Number of Terminals=2, Packaging="Cut Tape", Pricing="1=1.97, 50=1.4, 100=1.04, 250=1.02, 500=0.955, 1000=0.895 (GBP)", REACH SVHC=Yes, RMS Current (Irms)=8A, RoHS=Compliant, Shielding=Shielded, Stock=19584, Supplier=Farnell, Supplier Part Number=XFL4020-222MEC, Termination=SMD/SMT, Tolerance=20%, Width=4mm
OSC30: "CRYSTAL 32.768kHz 12.5pF SMD"
P50: library part CMP-2000-05904-1, "Male Header, Pitch 2.5 mm, 1 x 4 Position, Height 6 mm, Tail Length 3.2 mm, -25 to 85 degC, RoHS, Bulk", Manufacturer=JST, Package Description="Male Header, Pitch 2.5 mm, 1 x 4 Position, Height 6 mm, Tail Length 3.2 mm", Package Reference=B4B-EH-A, Datasheet URL=http://www.jst-mfg.com/product/pdf/eng/eEH.pdf, Datasheet Version=12/2012, Manufacturer URL=http://www.jst.com/home2.html, Mounting Technology=SurfaceMount, No of Positions=4, Pitch=2.5mm, Style/Orientation=StraightHeader/Plug, Termination=Crimp, Type=ShroudedHeader
P51: library part CMP-1024-00357-1, "0.025\" SQ Post Header, Through-hole, Vertical, -55 to 125 degC, 2.54 mm Pitch, 4-Pin, Male, RoHS", Manufacturer=Samtec, Temperature Range="-55 to 125 degC", ComponentLink1Description="Manufacturer URL", ComponentLink1URL=http://www.samtec.com, ComponentLink2Description=Datasheet, ComponentLink2URL=http://www.samtec.com/documents/webfiles/pdf/TSW_TH.PDF, ComponentLink3Description="Package Specification", ComponentLink3URL=http://www.samtec.com/documents/webfiles/cpdf/TSW-XXX-XX-XXX-X-XX-XXX-MKT.pdf, DatasheetVersion=F-214, Mounting Technology=Through-hole, Orientation=Vertical, PackageDescription=".025[0.64] SQ. Post Terminal Strip Assembly", PackageReference=TSW-104-08-X-S, PackageVersion="DM, 8/1988", PartNumber=TSW-104-08-G-S, Pitch="2.54 mm", RoHS=True
Q40: library part CMP-2000-05778-1, "P-Channel MOSFET, 30 V, 4 A, -55 to 150 degC, 3-Pin SOT-23-3L, RoHS, Tape and Reel", Continuous Drain Current=4A, Drain-Source On-Volt=30V, Frequency (Max)=NotRequiredMHz, Gate-Source Voltage (Max)=?12V, Manufacturer="Alpha and Omega", Operating Temp Range=-55Cto150C, Operating Temperature Classification=Military, Output Power (Max)=NotRequiredW, Package Description="3-Pin Small Outline Transistor, Body 2.95 x 1.6 mm, Pitch 0.95 mm", Package Reference=SOT-23-3L, Package Type=SOT-23, Power Dissipation=1.4W, Power Gain=NotRequireddB, Channel Mode=Enhancement, Datasheet URL=http://www.aosmd.com/res/data_sheets/AO3401A.pdf, Datasheet Version="Rev. 3, 03/2011", Drain Current (Max)=4A, Drain Efficiency=NotRequired%, Drain-Source On-Res=0.044ohm, Manufacturer URL=http://www.aosmd.com/, Mounting=SurfaceMount, Mounting Technology=SurfaceMount, Noise Figure=NotRequireddB, Number of  Elements=1, Package URL=http://www.aosmd.com/res/packaging_information/SOT-23-3L.pdf, Pin Count=3, Polarity=P, Rad Hardened=No, Type=PowerMOSFET
Q41: library part CMP-2000-04931-2, "TRANS NPN 40V 0.2A SMD SOT23-3", Case/Package=SOT-23, Collector Base Voltage (VCBO)=60V, Collector Emitter Breakdown Voltage=40V, Collector Emitter Saturation Voltage=300mV, Continuous Collector Current=200mA, Emitter Base Voltage (VEBO)=6V, Frequency=300MHz, Max Operating Temperature=150°C, Max Power Dissipation=300mW, Min Operating Temperature=-55°C, Package Quantity=3000, Power Dissipation=350mW, Collector Emitter Voltage (VCEO)=40V, Contact Plating=Tin, Element Configuration=Single, Gain Bandwidth Product=300MHz, Height=1mm, hFE Min=100, Lead Free="Lead Free", Length=3.05mm, Max Breakdown Voltage=40V, Max Collector Current=200mA, Max Frequency=300MHz, Mount="Surface Mount", Number of Elements=1, Number of Pins=3, Packaging="Tape and Reel", Polarity=NPN, Radiation Hardening=No, REACH SVHC="No SVHC", Transition Frequency=300MHz, Voltage Rating (DC)=40V, Weight=0.000282oz, Width=1.4mm
R20: library part RK73H2BTTD6802F, "Res Thick Film 1206 68K Ohm 1% 0.25W(1/4W) ±100ppm/C Pad SMD T/R Automotive AEC-Q200", Case Code (Imperial)=1206, Case Code (Metric)=3216, Manufacturer="KOA Speer", Max Operating Temperature=155°C, Min Operating Temperature=-55°C, Power Rating=250mW, Ratings=AEC-Q200, Temperature Coefficient=100ppm/°C, Tolerance=1%, Voltage Rating=200V, Case/Package=1206, Category="Chip SMD Resistors", China RoHS=Non-Compliant, ComponentLink1Description=https://datasheet.octopart.com:443/RK73H2BTTD6802F-KOA-Speer-datasheet-181956035.pdf?src-supplier=IHS, ComponentLink1URL=https://datasheet.octopart.com:443/RK73H2BTTD6802F-KOA-Speer-datasheet-181956035.pdf?src-supplier=IHS, ComponentLink2Description=https://datasheet.octopart.com:443/RK73H2BTTD6802F-KOA-Speer-datasheet-11590619.pdf?src-supplier=Upverter, ComponentLink2URL=https://datasheet.octopart.com:443/RK73H2BTTD6802F-KOA-Speer-datasheet-11590619.pdf?src-supplier=Upverter, ComponentLink3Description=https://datasheet.octopart.com:443/RK73H2BTTD6802F-KOA-Speer-datasheet-149653815.pdf?src-supplier=Newark, ComponentLink3URL=https://datasheet.octopart.com:443/RK73H2BTTD6802F-KOA-Speer-datasheet-149653815.pdf?src-supplier=Newark, ComponentLink4Description=https://datasheet.octopart.com:443/RK73H2BTTD6802F-KOA-Speer-datasheet-155997623.pdf?src-supplier=Future+Electronics, ComponentLink4URL=https://datasheet.octopart.com:443/RK73H2BTTD6802F-KOA-Speer-datasheet-155997623.pdf?src-supplier=Future+Electronics, ComponentLink5Description=https://datasheet.octopart.com/RK73H-%7C-Flat-Chip-Resistors-%28Precision-Grade%29-KOA-Speer-datasheet-family-85.pdf, ComponentLink5URL=https://datasheet.octopart.com/RK73H-%7C-Flat-Chip-Resistors-%28Precision-Grade%29-KOA-Speer-datasheet-family-85.pdf, ComponentLink6Description=https://datasheet.octopart.com:443/RK73H2BTTD6802F-KOA-Speer-datasheet-10854116.pdf?src-supplier=element14+APAC, ComponentLink6URL=https://datasheet.octopart.com:443/RK73H2BTTD6802F-KOA-Speer-datasheet-10854116.pdf?src-supplier=element14+APAC, ComponentLink7Description=http://sigma.octopart.com:80/rohs_certificate/RK73H-%7C-Flat-Chip-Resistors-%28Precision-Grade%29-KOA-Speer-family-91.pdf?src-supplier=Compliance+Statements, ComponentLink7URL=http://sigma.octopart.com:80/rohs_certificate/RK73H-%7C-Flat-Chip-Resistors-%28Precision-Grade%29-KOA-Speer-family-91.pdf?src-supplier=Compliance+Statements, Composition="Thick Film", Country of Origin=Japan, Export Control Classification Number (ECCN) Code=EAR99, Harmonized Tariff Schedule (HTS) Code=8533.21.00.30, Height=600µm, Introduction Date=2002-06-01, Lead Free="Lead Free", Length=3.2mm, Lifecycle Status=Production, Manufacturer Part Number=RK73H2BTTD6802F, Mounting Technology="Surface Mount", Number of Terminals=2, Pins=2, Pricing="10000=0.0041 (USD)", REACH SVHC=Yes, RoHS=Compliant, Schedule B=8533210045, Stock=10000, Supplier="Arrow Electronics", Supplier Part Number=RK73H2BTTD6802F, Termination=SMD/SMT, Width=1.6mm, Working Voltage=200V
R21: library part ERJPB6B1202V, "Res Thick Film 0805 12K Ohm 0.1% 0.25W(1/4W) ±50ppm/C Pad SMD Automotive T/R", Case Code (Imperial)=0805, Case Code (Metric)=2012, Manufacturer=ROHM, Manufacturer Lifecycle Status=ACTIVE, Manufacturer Part Number=ESR10EZPJ123, Max Operating Temperature=155°C, Max Power Dissipation=400mW, Min Operating Temperature=-55°C, Ratings="AEC-Q200, IATF 16949", Supplier Part Number=RHM12KKTR-ND, Temperature Coefficient=200ppm/°C, Tolerance=5%, Voltage Rating=150V, Voltage Rating (DC)=15V, Case/Package=0805, Category="Chip SMD Resistors", China RoHS=Non-Compliant, ComponentLink1Description=https://datasheet.octopart.com:443/ESR10EZPJ123-ROHM-datasheet-182147623.pdf?src-supplier=IHS, ComponentLink1URL=https://datasheet.octopart.com:443/ESR10EZPJ123-ROHM-datasheet-182147623.pdf?src-supplier=IHS, ComponentLink2Description=https://datasheet.octopart.com:443/ESR10EZPJ123-Rohm-datasheet-80324120.pdf?src-supplier=Future+Electronics, ComponentLink2URL=https://datasheet.octopart.com:443/ESR10EZPJ123-Rohm-datasheet-80324120.pdf?src-supplier=Future+Electronics, ComponentLink3Description=https://datasheet.octopart.com:443/ESR10EZPJ123-Rohm-datasheet-68299596.pdf?src-supplier=Future+Electronics, ComponentLink3URL=https://datasheet.octopart.com:443/ESR10EZPJ123-Rohm-datasheet-68299596.pdf?src-supplier=Future+Electronics, ComponentLink4Description=https://datasheet.octopart.com:443/ESR10EZPJ123-Rohm-datasheet-8327111.pdf?src-supplier=_legacy+Avnet, ComponentLink4URL=https://datasheet.octopart.com:443/ESR10EZPJ123-Rohm-datasheet-8327111.pdf?src-supplier=_legacy+Avnet, ComponentLink5Description=https://datasheet.octopart.com:443/RC0402F123CS-Samsung-Electro-Mechanics-datasheet-141348306.pdf?src-supplier=IHS, ComponentLink5URL=https://datasheet.octopart.com:443/RC0402F123CS-Samsung-Electro-Mechanics-datasheet-141348306.pdf?src-supplier=IHS, ComponentLink6Description=https://datasheet.octopart.com/RC0402F123CS-Samsung-Electro-Mechanics-datasheet-41960856.pdf, ComponentLink6URL=https://datasheet.octopart.com/RC0402F123CS-Samsung-Electro-Mechanics-datasheet-41960856.pdf, ComponentLink7Description=https://datasheet.octopart.com:443/ERJPB6B1202V-Panasonic-datasheet-182147307.pdf?src-supplier=IHS, ComponentLink7URL=https://datasheet.octopart.com:443/ERJPB6B1202V-Panasonic-datasheet-182147307.pdf?src-supplier=IHS, ComponentLink8Description=https://datasheet.octopart.com:443/ERJPB6B1202V-Panasonic-datasheet-82522998.pdf?src-supplier=Panasonic, ComponentLink8URL=https://datasheet.octopart.com:443/ERJPB6B1202V-Panasonic-datasheet-82522998.pdf?src-supplier=Panasonic, ComponentLink9Description=https://datasheet.octopart.com:443/ERJPB6B1202V-Panasonic-datasheet-136610817.pdf?src-supplier=Newark, ComponentLink9URL=https://datasheet.octopart.com:443/ERJPB6B1202V-Panasonic-datasheet-136610817.pdf?src-supplier=Newark, ComponentLink10Description=https://sigma.octopart.com:443/150570796/technical_drawing/Panasonic-ERJPB6B1202V.pdf?src-supplier=Panasonic+SCT, ComponentLink10URL=https://sigma.octopart.com:443/150570796/technical_drawing/Panasonic-ERJPB6B1202V.pdf?src-supplier=Panasonic+SCT, ComponentLink11Description=https://datasheet.octopart.com:443/ERJPB6B1202V-Panasonic-datasheet-177212511.pdf?src-supplier=Burklin+Elektronik, ComponentLink11URL=https://datasheet.octopart.com:443/ERJPB6B1202V-Panasonic-datasheet-177212511.pdf?src-supplier=Burklin+Elektronik, Composition="Thick Film", Contact Plating=Tin, Country of Origin="Mainland China, Philippines, South Korea", Export Control Classification Number (ECCN) Code=EAR99, Features="Automotive AEC-Q200", Harmonized Tariff Schedule (HTS) Code=8533.21.00.30, Height=550µm, Height - Seated (Max)=711.2µm, Introduction Date=2015-05-13, Lead Free="Lead Free", Length=2mm, Lifecycle Status=Production, Mounting Technology="Surface Mount", Number of Terminals=2, Number of Terminations=2, Packaging="Tape & Reel", Part Series="High Precision Thick Film Chip Resistors", Power Rating=400mW, Pricing="5000=0.01519, 10000=0.01291 (USD)", REACH SVHC=Yes, RoHS=Compliant, Schedule B=8533210045, Stock=10000, Supplier=DigiKey, Thickness=130µm, Width=1.25mm, Working Voltage=150V
R22 R30 R40 R41 R50 R51 R52 R53 R54: library part RES_1206, "SMD 3.2mm × 1.6mm size resistor (1206)"
S20 S22 S23 S40 S41 S42 S45: "Solder Bridge triangular closed"
S21 S43 S44: "Soldering Bridge close SMD"
SIM40: "SIM800L through hole gsm module"
SW30: library part CMP-47024-000004-1, "SWITCH TACTILE SPST-NO 0.05A 12V", Actuator Color=Black, Contact Resistance=100mR, Current Rating=50mA, Max Operating Temperature=70°C, Max Voltage Rating (DC)=12V, Min Operating Temperature=-20°C, Operating Force=160gf, Package Quantity=2000, Actuator Length=1.4mm, Actuator Material=Thermoplastic, Actuator Type=Standard, Color=Black, Contact Material=Bronze, Contact Plating=Silver, Electrical Life=100000Cycles, Illumination Type=Non-Illuminated, Mechanical Life=100000Cycles, Mount="Through Hole", Orientation=Straight, Packaging=Bulk, REACH SVHC="No SVHC", RoHS Compliant=Yes, Series=MJTP, Switch Function=Off-Mom, Switch Travel=0.25mm, Termination="PC Pin", Throw Configuration=SPST, Voltage Rating (DC)=12V
U20: "3", Case/Package=LSSOP, Manufacturer=Torex, Manufacturer Part Number=XC6206P332MR-G, Max Operating Temperature=85°C, Max Supply Voltage=6V, Min Input Voltage=1.8V, Min Operating Temperature=-40°C, Output Voltage=3.3V, Supplier Part Number=893-XC6206P332MR-GTR-ND, Voltage Tolerance=2%, Category="LDO Voltage Regulators", ComponentLink1Description=https://datasheet.octopart.com:443/XC6206P332MR-G-Torex-datasheet-181386674.pdf?src-supplier=IHS, ComponentLink1URL=https://datasheet.octopart.com:443/XC6206P332MR-G-Torex-datasheet-181386674.pdf?src-supplier=IHS, ComponentLink2Description=https://datasheet.octopart.com:443/XC6206P332MR-G-Torex-datasheet-134531119.pdf?src-supplier=TME, ComponentLink2URL=https://datasheet.octopart.com:443/XC6206P332MR-G-Torex-datasheet-134531119.pdf?src-supplier=TME, ComponentLink3Description=https://datasheet.octopart.com:443/XC6206P332MR-G-Torex-datasheet-62046785.pdf?src-supplier=SHENGYU+ELECTRONICS, ComponentLink3URL=https://datasheet.octopart.com:443/XC6206P332MR-G-Torex-datasheet-62046785.pdf?src-supplier=SHENGYU+ELECTRONICS, ComponentLink4Description=https://datasheet.octopart.com:443/XC6206P332MR-G-Torex-datasheet-30458793.pdf?src-supplier=Seeed+Studio, ComponentLink4URL=https://datasheet.octopart.com:443/XC6206P332MR-G-Torex-datasheet-30458793.pdf?src-supplier=Seeed+Studio, Height - Seated (Max)=1.3mm, Length=2.9mm, Lifecycle Status=Production, Number of Channels=1, Number of Circuits=1, Number of Outputs=1, Number of Terminals=3, Pricing="3000=0.24092, 6000=0.23453, 9000=0.23133, 15000=0.22778, 21000=0.22571, 30000=0.22371 (USD)", REACH SVHC=Yes, RoHS=Compliant, Stock=3000, Supplier=DigiKey, Terminal Pitch=950µm, Width=1.6mm
U21: "Switching Voltage Regulators 3.7-A boost converter with 0.5-V ultra-low input vo", Manufacturer="Texas Instruments", Manufacturer Lifecycle Status=ACTIVE, Max Junction Temperature (Tj)=125°C, Max Supply Voltage=5.5V, Min Operating Temperature=-40°C, Min Supply Voltage=500mV, Nominal Supply Current=900nA, Output Current=3.7A, Supplier Part Number=296-TPS61023DRLRTR-ND, Category="Voltage Regulators - Switching", ComponentLink1Description=https://sigma.octopart.com:443/181443429/technical_drawing/Texas-Instruments-TPS61023DRLR.pdf?src-supplier=Texas+Instruments, ComponentLink1URL=https://sigma.octopart.com:443/181443429/technical_drawing/Texas-Instruments-TPS61023DRLR.pdf?src-supplier=Texas+Instruments, ComponentLink2Description=https://octopart.com:443/opatz8j6/c1?t=zyOQleeQE8oLSqcAalxdDo3IzngUSb6qW0xoQPFG-OpktvE5sTVhc_u5fgw44jO42BG8o5NLEr2IGCXOilT0ZzZHi8hsfSP8-jfyobuhC8rJog1zy9Po-Mu1Eb699a1TRS2F6YKZGmVxF-MtZwjJGnSs2XBC4L7unR9MEC2OSL8jXNufOWy_70nkXFNc1gPN9bE1BWKJqJdrvkSolJDOb8_OgdP1gf8ZhoZciT4xsMx_e2aPeWGIPyMYnWe1iSdwtP4F6JoCEMvN7e2Kj02C4lo69w7tRubE0ZsGNY9dLxO3XYZKWIKxeoh7nQ82TQOfq_fUKCDCci_4ewscxq_iqWwwYrdWznK4hJhrMZFNlos7TSPV0WhLN2_pC5NqraIp5JHG1eUs1Q&src-supplier=Texas+Instruments, ComponentLink2URL=https://octopart.com:443/opatz8j6/c1?t=zyOQleeQE8oLSqcAalxdDo3IzngUSb6qW0xoQPFG-OpktvE5sTVhc_u5fgw44jO42BG8o5NLEr2IGCXOilT0ZzZHi8hsfSP8-jfyobuhC8rJog1zy9Po-Mu1Eb699a1TRS2F6YKZGmVxF-MtZwjJGnSs2XBC4L7unR9MEC2OSL8jXNufOWy_70nkXFNc1gPN9bE1BWKJqJdrvkSolJDOb8_OgdP1gf8ZhoZciT4xsMx_e2aPeWGIPyMYnWe1iSdwtP4F6JoCEMvN7e2Kj02C4lo69w7tRubE0ZsGNY9dLxO3XYZKWIKxeoh7nQ82TQOfq_fUKCDCci_4ewscxq_iqWwwYrdWznK4hJhrMZFNlos7TSPV0WhLN2_pC5NqraIp5JHG1eUs1Q&src-supplier=Texas+Instruments, ComponentLink3Description=https://sigma.octopart.com:443/179311942/technical_drawing/Texas-Instruments-TPS61023DRLR.pdf?src-supplier=Texas+Instruments, ComponentLink3URL=https://sigma.octopart.com:443/179311942/technical_drawing/Texas-Instruments-TPS61023DRLR.pdf?src-supplier=Texas+Instruments, ComponentLink4Description=https://sigma.octopart.com:443/158890725/technical_drawing/Texas-Instruments-TPS61023DRLR.pdf?src-supplier=Texas+Instruments, ComponentLink4URL=https://sigma.octopart.com:443/158890725/technical_drawing/Texas-Instruments-TPS61023DRLR.pdf?src-supplier=Texas+Instruments, ComponentLink5Description=https://sigma.octopart.com:443/149978429/technical_drawing/Texas-Instruments-TPS61023DRLR.pdf?src-supplier=Texas+Instruments, ComponentLink5URL=https://sigma.octopart.com:443/149978429/technical_drawing/Texas-Instruments-TPS61023DRLR.pdf?src-supplier=Texas+Instruments, ComponentLink6Description=https://datasheet.octopart.com:443/TPS61023DRLR-Texas-Instruments-datasheet-152518939.pdf?src-supplier=Upverter, ComponentLink6URL=https://datasheet.octopart.com:443/TPS61023DRLR-Texas-Instruments-datasheet-152518939.pdf?src-supplier=Upverter, ComponentLink7Description=https://datasheet.octopart.com:443/TPS61023DRLR-Texas-Instruments-datasheet-182474952.pdf?src-supplier=LCSC, ComponentLink7URL=https://datasheet.octopart.com:443/TPS61023DRLR-Texas-Instruments-datasheet-182474952.pdf?src-supplier=LCSC, ComponentLink8Description=https://datasheet.octopart.com:443/TPS61023DRLR-Texas-Instruments-datasheet-163726964.pdf?src-supplier=LCSC, ComponentLink8URL=https://datasheet.octopart.com:443/TPS61023DRLR-Texas-Instruments-datasheet-163726964.pdf?src-supplier=LCSC, ComponentLink9Description=http://sigma.octopart.com:80/reach_statement/Texas-Instruments-company-64.pdf?src-supplier=Compliance+Statements, ComponentLink9URL=http://sigma.octopart.com:80/reach_statement/Texas-Instruments-company-64.pdf?src-supplier=Compliance+Statements, ComponentLink10Description=http://sigma.octopart.com:80/conflict_mineral_statement/Texas-Instruments-company-63.pdf?src-supplier=Compliance+Statements, ComponentLink10URL=http://sigma.octopart.com:80/conflict_mineral_statement/Texas-Instruments-company-63.pdf?src-supplier=Compliance+Statements, Height=600µm, Length=1.6mm, Lifecycle Status=Production, Manufacturer Part Number=TPS61023DRLR, Max Duty Cycle=97%, Max Operating Temperature=125°C, Number of Channels=1, Number of Outputs=1, Pins=6, Pricing="4000=0.52619, 8000=0.5149, 12000=0.50924 (USD)", RoHS=Compliant, Stock=28000, Supplier=DigiKey, Thickness=550µm, Topology=Boost, Width=1.2mm
U30: library part CMP-1546-00070-1, "ARM Cortex-M0+ 32 Bit 32MHz 37 LQFP-48(7x7) Microcontrollers RoHS", I/Os (High Current)=40, Operating Frequency(F) (Processor speed) (MHz)=32, Package Description="48-Pin Low Profile Quad Flat Package, Body 7 x 7 mm, Pitch 0.5 mm", Package Reference=LQFP48, Supply Voltage(Vcc) min (V)=1.8, ComponentLink1Description="Manufacturer URL", ComponentLink1URL=http://www.st.com/, ComponentLink2Description=Datasheet, ComponentLink2URL=http://www.st.com/st-web-ui/static/active/en/resource/technical/document/datasheet/DM00141036.pdf, Core="ARM Cortex-M0+", D/A Converter=2, Data E2PROM nom (B)=6144, DatasheetVersion="Rev. 2", FLASH Size (Prog) (kB)=192, Internal RAM Size (kB)=20, Mounting Technology="Surface Mount", Packing=Tray

## Free pads (board coordinates)
  round 3.4 hole 3.2: 1(3,3) 2(39,57) 3(75,3)

## Via types
v1: diameter 0.7, hole 0.3, Top Layer to Bottom Layer, tented both sides, 43 vias
v2: diameter 0.5, hole 0.25, Top Layer to Bottom Layer, tented both sides, 6 vias
v3: diameter 0.6, hole 0.3, Top Layer to Bottom Layer, tented both sides, 4 vias
v4: diameter 0.8, hole 0.4, Top Layer to Bottom Layer, tented both sides, 1 vias

## Nets (pads, with @x,y where several pads share a name; then routed paths per layer and width w, separated by ;. In a path a pad name is that pad's centre, name@x,y a point inside that pad or via, vN(x,y) a via of type N, cw(c..) or ccw(c..) an arc to the next point about the centre after c; other vN are vias at no path point)
+3V3: C21.2 C33.2 C34.2 C35.2 C36.2 C37.2 C38.2 J50.2 J52.1 J53.1 J54.1 P50.2 P51.1 R50.2 R51.2 R52.2 R53.2 TP22.1 U20.2 U30.1 U30.9 U30.24 U30.36 U30.48 | length 256.6
  Top Layer w0.254: C37.2 32.9,38.1 33.4,38.6 U30.9 ; C36.2 32,43.375 33.225,43.375 34,42.6 U30.1 ; C38.2 34.575,45.75 34.925,45.4 35.65,45.4 36.225,44.825 36.229,44.825 36.25,44.804 U30.48 ; U30.24 41.75,34.85 42.4,34.2 43.025,34.2 43.4,33.825 C35.2@43.4,32.925 ; U30.36 44,42.6 44.5,43.1 44.5,43.975 44.75,44.225 C34.2
  Top Layer w0.3: U20.2 66.55,20.05 v2(67,20.5) ; TP22.1 72.787,26.538 72.962,26.538 v2(73,26.5)
  Top Layer w0.5: R53.2 13.4,30.5 13.9,31 13.9,34.3 15.3,35.7 ; C37.2 31.35,38.1 28.773,35.523 19.608,35.523 19.431,35.7 17.369,35.7 15.3,35.7 ; J53.1 31.643,22.168 36.268,22.168 R51.2 36.65,22.55 38.25,22.55 ; C36.2 31.5,43.675 31.089,43.675 29.194,45.569 29.194,47.806 ; C38.2 34.575,46.875 34.175,47.275 34.1,47.275 33.569,47.806 29.194,47.806 ; v1(40.7,52.3) 29.9,52.3 27.3,49.7 ; C35.2@43.4,32.925 43.4,30.2 J54.1 41.5,26.925 40.85,26.275 40.85,25.45 R52.2 40.4,24.7 38.25,22.55 ; C35.2 46.175,32.9 C33.2 46.45,27.425 50.95,22.925 55.15,22.925 57.925,20.15 C21.2@58.6,20.15 ; J52.1 43.715,17.685 41.8,19.6 R50.2 41.2,19.6 38.25,22.55 ; C34.2 51.793,44.225 52.913,43.105 J50.2 58.595,43.105 59.4,42.3 62.725,42.3 P50.2 ; v4(62.3,22.8) 60.2,22.8 58.95,21.55 58.95,20.5 65.018,20.5 65.468,20.05 U20.2@65.56,20.142 ; U20.2 U20.2@65.818,20.308 ; 15.3,35.7 15.3,37.55 14.1,38.75 14.1,46.1 17.7,49.7 27.3,49.7 ; 27.3,49.7 29.194,47.806
  Bottom Layer w0.3: v2(67,20.5) 71.75,15.75 73.5,15.75 73.75,16 73.75,25.75 v2(73,26.5)